# Altium PCB PCB1.PcbDoc
Units mm, origin at the board's own origin, x right, y up, seen from the top; angles counter-clockwise.
Board outline 60 x 65 mm, 2 copper layers (Top Layer, Bottom Layer); 40 components, 29 nets, 152 pads, 30 vias.
Unrouted connection lines stored in the file: 1.
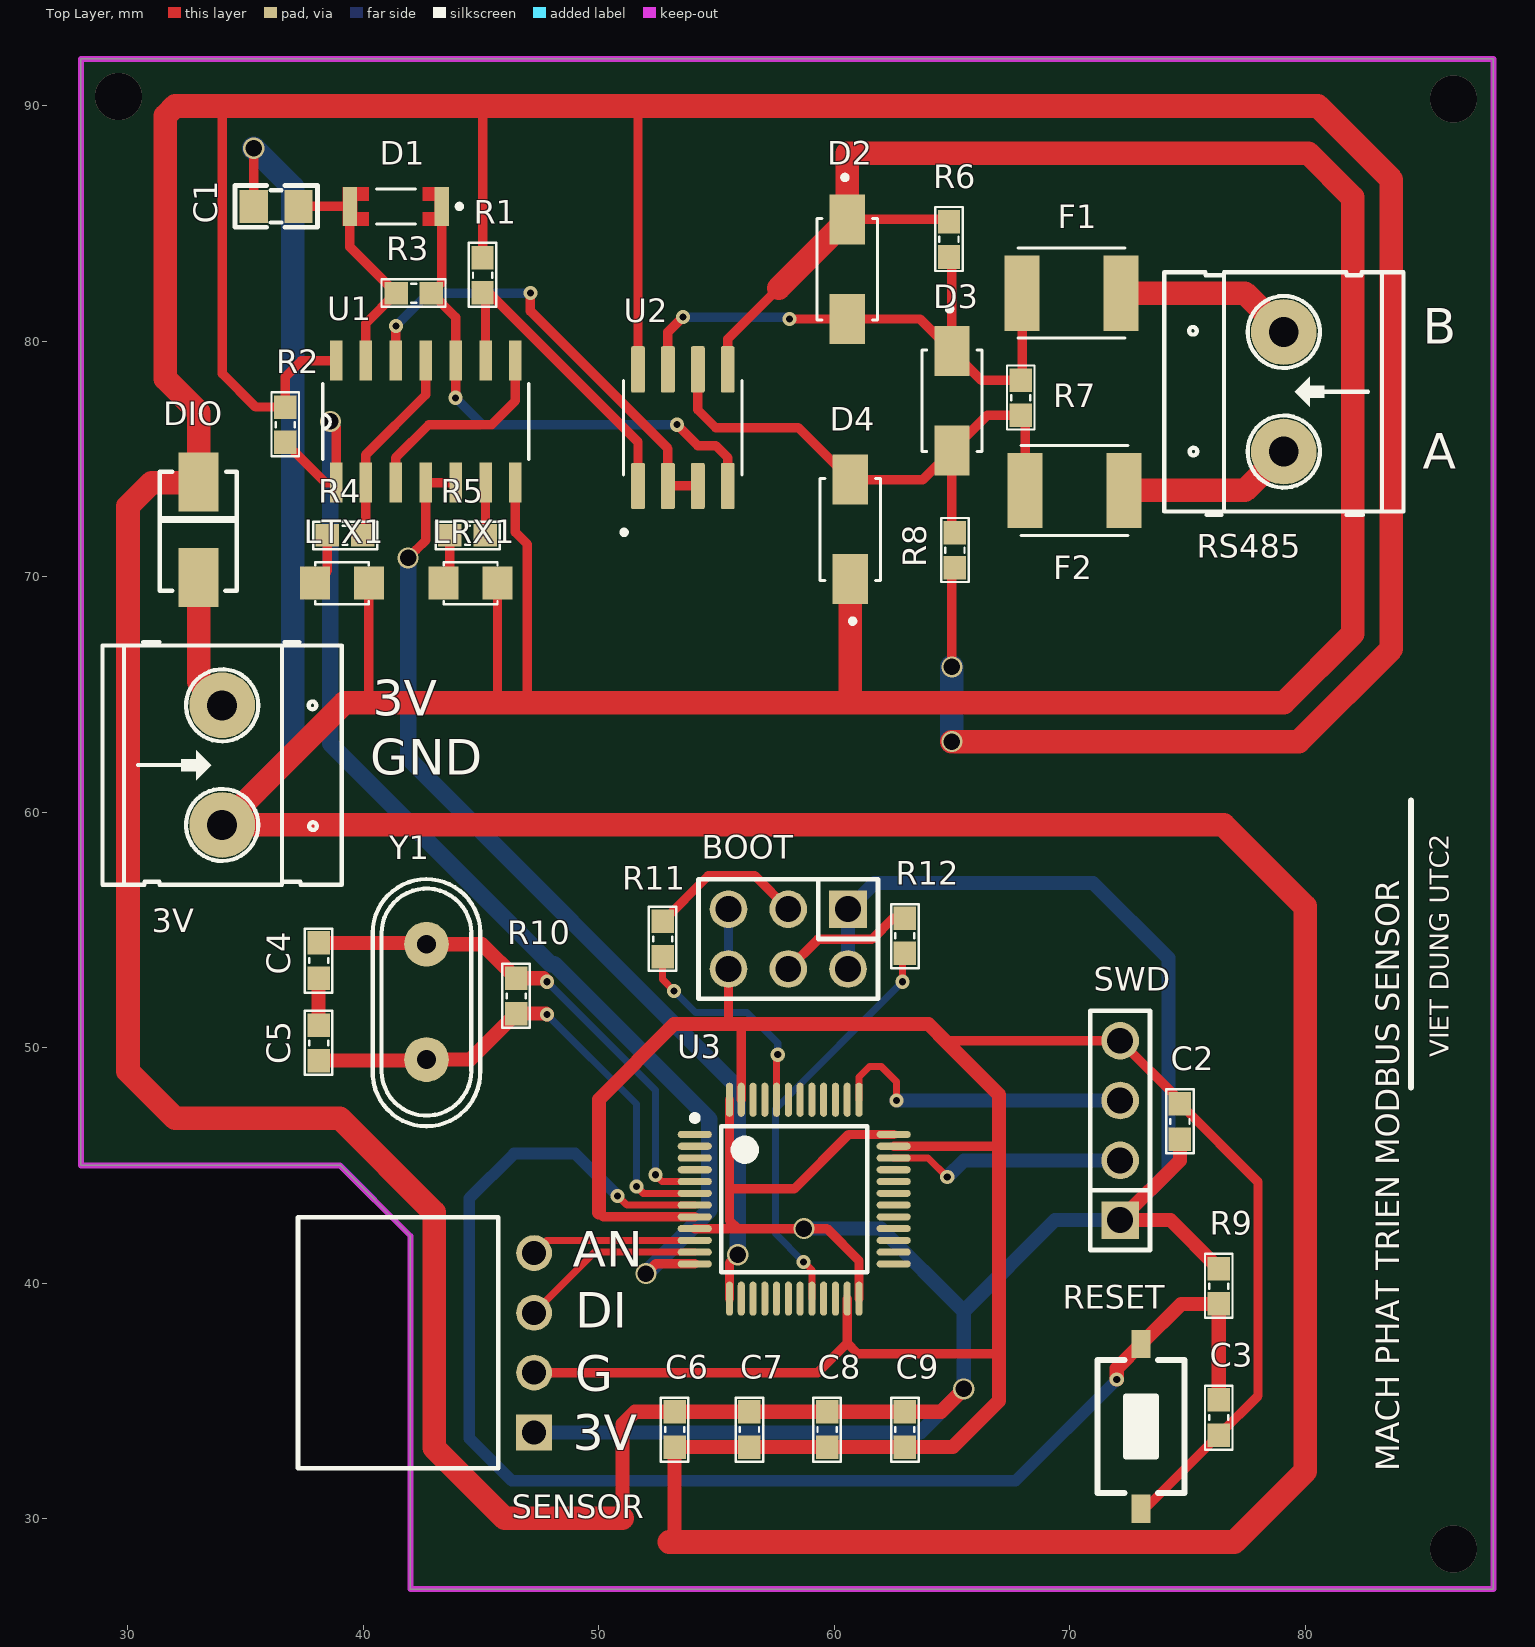
[diagram p0: Top Layer view]
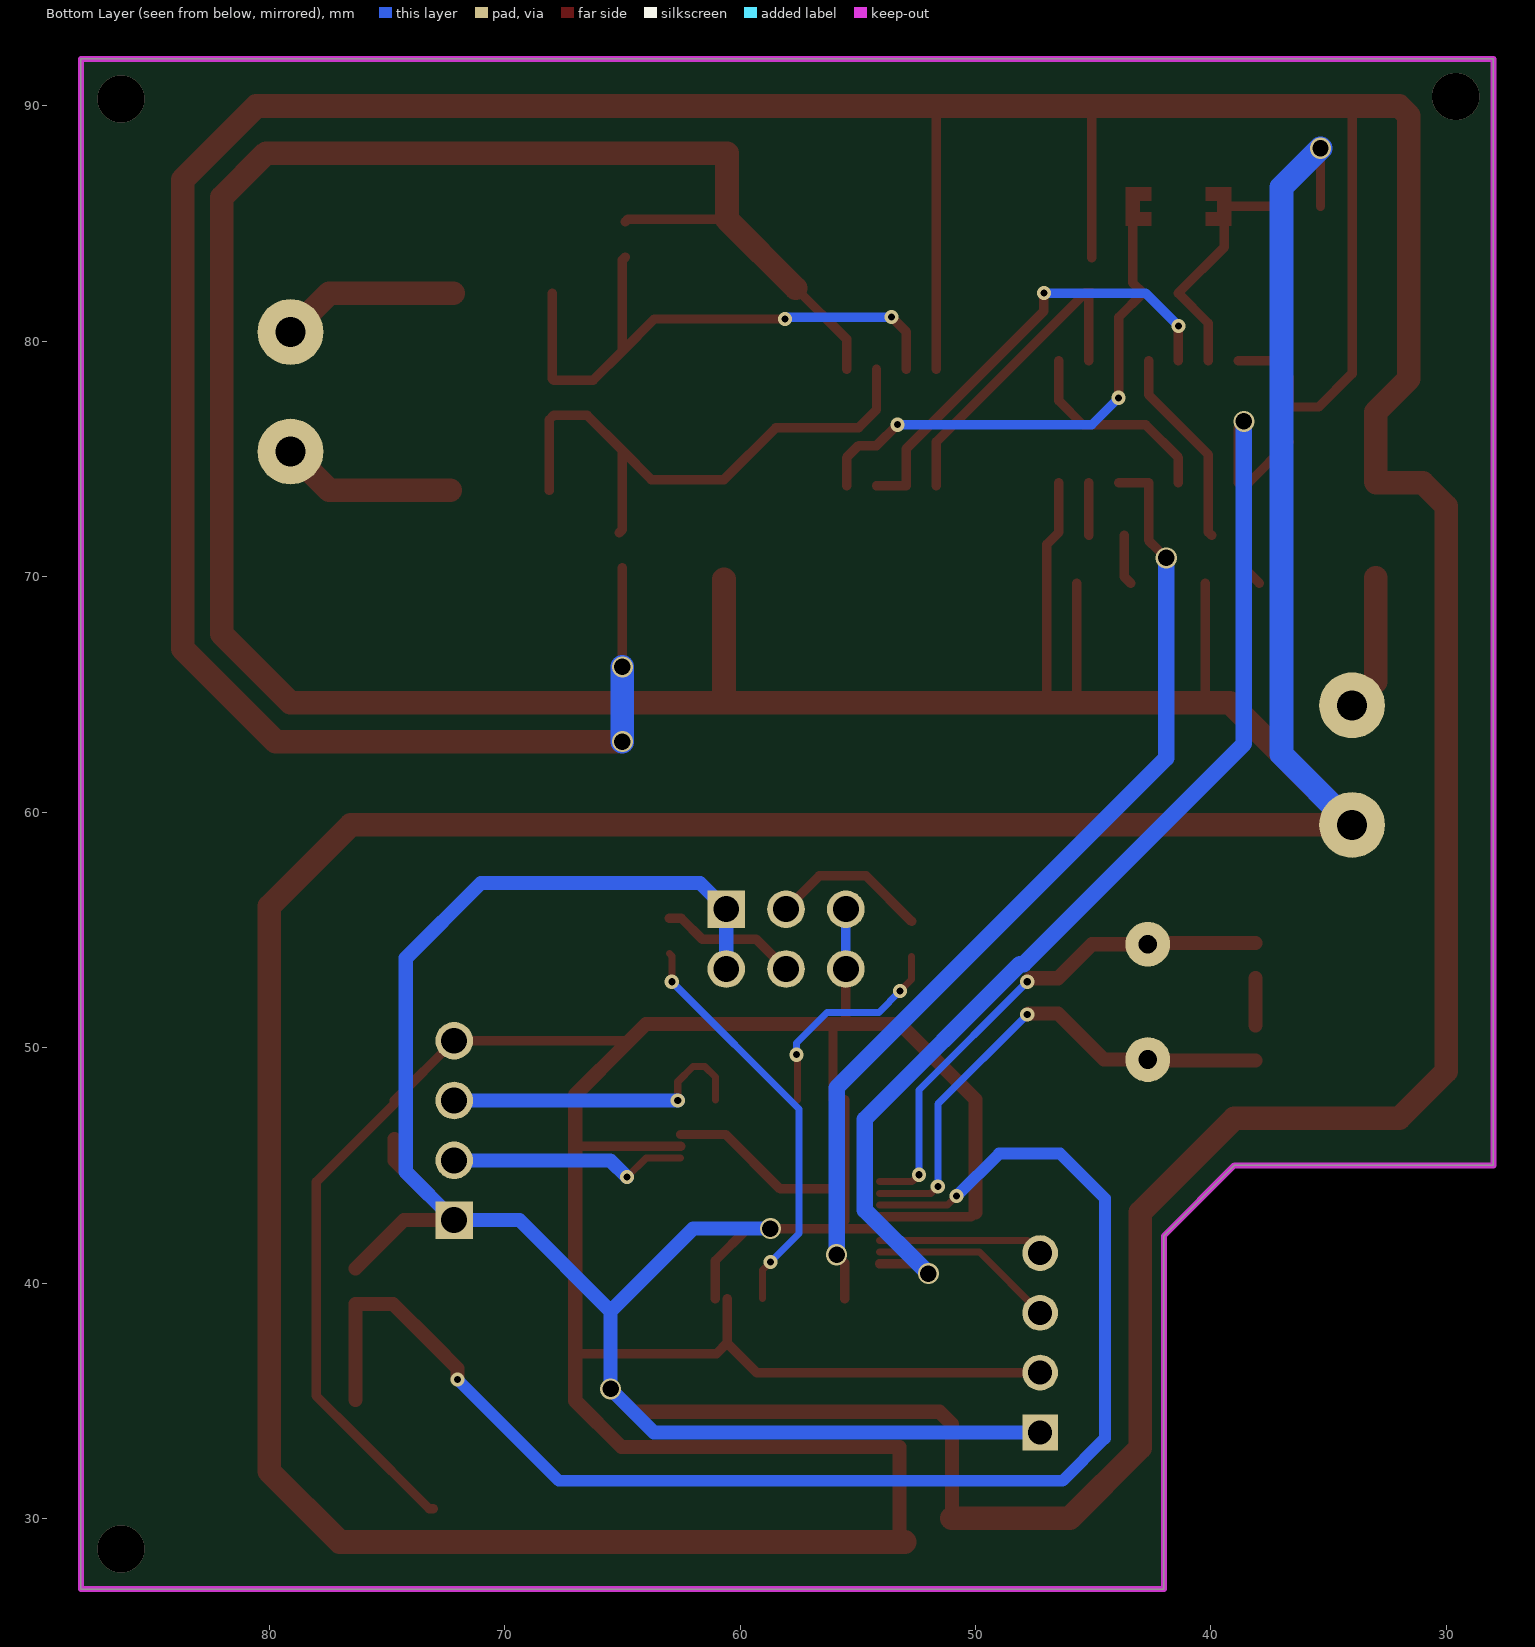
[diagram p1: Bottom Layer view, seen from below]

## Layer stack, top to bottom
Top Solder: solder mask 0.0102, Solder Resist, Dk 3.5
Top Layer: signal copper 0.0356
Dielectric 1: dielectric 0.32, FR-4, Dk 4.8
Bottom Layer: signal copper 0.0356
Bottom Solder: solder mask 0.0102, Solder Resist, Dk 3.5

## Board outline
42,42 39,45 28,45 28,92 88,92 88,27 42,27

## Design rules (kind name [scope] priority, off if disabled: settings)
Clearance [All] p1: gap=0.1 ignorepadtopadclearanceinfootprint=FALSE
PolygonConnect [All] p1: connectstyle=Relief reliefconductorwidth=0.254 reliefentries=4 polygonreliefangle="90 Angle" airgapwidth=0.254
RoutingVias [InNetClass('Power')] p1: holewidth=0.7 width=0.9 viastyle="Through Hole" minholewidth=0.7 minwidth=0.9 maxholewidth=0.7 maxwidth=0.9
RoutingVias RoutingVias_1 [InNetClass('All Nets')] p2: holewidth=0.3 width=0.6 viastyle="Through Hole" minholewidth=0.3 minwidth=0.6 maxholewidth=0.3 maxwidth=0.6
SolderMaskExpansion [All] p1: expansion=0.102
Width [InNetClass('Power')] p1: maxlimit=2 minlimit=0.4 preferedwidth=1
Width Width_1 [InNetClass('All Nets')] p2: maxlimit=1 minlimit=0.3 preferedwidth=0.4
30 further rules are at their usual default settings.

## Classes and differential pairs
net class Power: GND RX2 TX2 VCC3V
component class U_rs485: C1 D1 D2 D3 D4 F1 F2 LRX1 LTX1 R1 R2 R3 R4 R5 R6 R7 R8 RS485 U1 U2
component class Sheet1: BOOT C2 C3 C4 C5 C6 C7 C8 C9 R9 R10 R11 R12 RESET SENSOR SWD U3 Y1

## Components (designator, comment, footprint, x,y, rotation, side; value= is the part's Value field where it differs from the comment)
3V "KF128 2P" KF128_2P 34,62 r270 top (schematic designator P1)
BOOT "JP 2x3 2.54" "JP 2x3 DT" 58.047,54.611 r180 top (schematic designator JP3)
C1 "33pF" "tu 0805" 36.298,85.733 r180 top
C2 "104" "tu 0603" 74.684,46.864 r90 top
C3 "105" "tu 0603" 76.335,34.291 r270 top
C4 "22pF" "tu 0603" 38.1,53.7 r270 top
C5 "22pF" "tu 0603" 38.1,50.2 r90 top
C6 "104" "tu 0603" 53.221,33.783 r270 top
C7 "104" "tu 0603" 56.396,33.783 r270 top
C8 "104" "tu 0603" 59.698,33.783 r270 top
C9 "104" "tu 0603" 63,33.783 r270 top
D1 "LL4148" DIO_LL4148 41.378,85.733 r180 top
D2 "SMAJ45A" DIOM4325X250N 60.555,83.066 r270 top
D3 "SMAJ45A" DIOM4325X250N 65,77.478 r270 top
D4 "SMAJ45A" DIOM4325X250N 60.682,72.017 r90 top
DIO "Comment" DIODE_DO214AC_SMA 33,72 r90 top
F1 "MF-MSMF020-2" FUSER_MF-MSMF020-2 70.08,82.05 r0 top
F2 "MF-MSMF020-2" FUSER_MF-MSMF020-2 70.207,73.668 r0 top
LRX1 "LED 0805" LED-0805-Red 43.41,69.731 r0 top
LTX1 "LED 0805" LED-0805-Red 37.949,69.731 r0 top
R1 "4.7k" "tro smd 0603" 45.061,82.812 r90 top
R2 "4.7k" "tro smd 0603" 36.679,76.462 r90 top
R3 "51k" "tro smd 0603" 42.14,82.05 r180 top
R4 "2.2k" "tro smd 0603" 39.219,71.763 r0 top
R5 "2.2k" "tro smd 0603" 44.426,71.763 r0 top
R6 "4.7k" "tro smd 0603" 64.873,84.336 r90 top
R7 "150R" "tro smd 0603" 67.921,77.605 r90 top
R8 "4.7k" "tro smd 0603" 65.127,71.128 r90 top
R9 "10k" "tro smd 0603" 76.335,39.867 r90 top
R10 "1M" "tro smd 0603" 46.49,52.198 r90 top
R11 "100k" "tro smd 0603" 52.713,54.611 r90 top
R12 "100k" "tro smd 0603" 63,54.75 r270 top
RESET "Nut Nhan 2 Chan SMD 3x6x2.5" "Nut Nhan 2 Chan SMD 3x6x2.5" 73.033,33.91 r90 top (schematic designator BT1)
RS485 "KF128 2P" KF128_2P 79.097,77.859 r90 top (schematic designator P1)
SENSOR "Sensor" "JP 1x4 CC" 47.252,37.466 r90 top (schematic designator JP1)
SWD "SWD" "JP 1x4 DT" 72.144,42.673 r90 top (schematic designator JP2)
U1 "74HC04D" SOIC127P600X175-14N 42.648,76.589 r90 top
U2 "MAX485ESA+T" SOIC127P600X175-8N 53.57,76.335 r90 top
U3 "STM32F103xx_LQFP48" STM32_LQPF48 58.301,43.562 r0 top
Y1 "16Mhz" "Thach Anh 2 chan cam" 42.68,51.944 r90 top value=4Mhz

## Footprints (in the part's own frame and the unit in brackets; to place one, negate y for a bottom-side part, rotate by r counter-clockwise, add the part's x,y. Pads: shape width x height; smd on the part's side, far side on the other; paste and mask are expansions set on the pad)
DIO_LL4148 [mm]
  rect 0.6x1.65 smd: A(1.95,0) C(-1.95,0)
  Top Layer region: 2.25,-0.825 1.15,-0.825 1.15,-0.25 1.65,-0.25 1.65,0.25 1.15,0.25 1.15,0.825 2.25,0.825
  Top Layer region: -1.15,0.25 -1.65,0.25 -1.65,-0.25 -1.15,-0.25 -1.15,-0.825 -2.24,-0.825 -2.24,0.825 -1.15,0.825
  silkscreen extent -2.8,-0.75 0.83,0.75, body extent -1.73,-0.75 1.73,0.75, height 1.5
DIODE_DO214AC_SMA [mm] "Diode 2214AC- SMA type"
  rect 2.5x1.7 smd: 1(-2.032,0) 2(2.032,0)
  silkscreen extent -2.59,-1.63 2.46,1.7, body extent -2.53,-1.35 2.47,1.35, height 2.25
DIOM4325X250N [mm]
  rect 2.12x1.5 smd: A(2.115,0) C(-2.115,0)
  silkscreen extent -4,-1.28 2.16,1.28
FUSER_MF-MSMF020-2 [mm]
  rect 1.5x3.2 smd: 1(-2.1,0) 2(2.1,0)
  silkscreen extent -2.27,-1.91 2.27,1.91, body extent -2.27,-1.62 2.27,1.62, height 0.85
"JP 1x4 CC" [mm]
  rect 1.52x1.52 hole 1.02: 1(-3.81,0)
  round 1.52 hole 1.02: 2(-1.27,0) 3(1.27,0) 4(3.81,0)
  silkscreen extent -5.33,1.52 5.33,10.03, body extent -5.33,-0.25 5.33,10.05, height 2.51
"JP 1x4 DT" [mm] "4 pins, 1 row, straight, gold plating"
  rect 1.6x1.6 hole 1.1: 1(0,0)
  round 1.6 hole 1.1: 2(2.54,0) 3(5.08,0) 4(7.62,0)
  silkscreen extent -1.27,-1.27 8.89,1.27, body extent -1.27,-1.27 8.89,1.27, height 8.54
"JP 2x3 DT" [mm]
  rect 1.6x1.6 hole 1.1: 1(-2.54,-1.27)
  round 1.6 hole 1.1: 2(0,-1.27) 3(2.54,-1.27) 4(2.54,1.27) 5(0,1.27) 6(-2.54,1.27)
  silkscreen extent -3.81,-2.54 3.81,2.54, body extent -3.81,-2.54 3.81,2.54, height 8.55
KF128_2P [mil] "Header 2,pitch 5.08mm, Colour Green"
  round 110 hole 50: 1(-100,0) 2(100,0)
  silkscreen extent -206,-200 200,200, body extent -223,-207 201,207, height 563
LED-0805-Red [mil]
  rect 50x55 smd: 1(0,0) 2(90,0)
  silkscreen extent 0,-35 90,35, body extent 5,-25 85,25, height 43
"Nut Nhan 2 Chan SMD 3x6x2.5" [mm] "Switch SMD type"
  rect 1.2x0.8 smd: 1(-3.5,0) 2(3.5,0)
  silkscreen extent -2.82,-1.85 2.82,1.85, body extent -3.05,-1.85 3.05,1.85, height 2.5
SOIC127P600X175-8N [mm]
  rrect25% 1.97x0.59 smd: 1(-2.475,1.905) 2(-2.475,0.635) 3(-2.475,-0.635) 4(-2.475,-1.905) 5(2.475,-1.905) 6(2.475,-0.635) 7(2.475,0.635) 8(2.475,1.905)
  silkscreen extent -4.54,-2.52 2,2.59, body extent -3,-2.45 3,2.45, height 1.75
SOIC127P600X175-14N [mil]
  rect 67x21 smd: 1(-102,150) 2(-102,100) 3(-102,50) 4(-102,0) 5(-102,-50) 6(-102,-100) 7(-102,-150) 8(102,-150) 9(102,-100) 10(102,-50) 11(102,0) 12(102,50) 13(102,100) 14(102,150)
  silkscreen extent -63,-172 63,172
STM32_LQPF48 [mm]
  oval 1.45x0.3 smd: 1(-4.225,2.75) 2(-4.225,2.25) 3(-4.225,1.75) 4(-4.225,1.25) 5(-4.225,0.75) 6(-4.225,0.25) 7(-4.225,-0.25) 8(-4.225,-0.75) 9(-4.225,-1.25) 10(-4.225,-1.75) 11(-4.225,-2.25) 12(-4.225,-2.75) 25(4.225,-2.75) 26(4.225,-2.25) 27(4.225,-1.75) 28(4.225,-1.25) 29(4.225,-0.75) 30(4.225,-0.25) 31(4.225,0.25) 32(4.225,0.75) 33(4.225,1.25) 34(4.225,1.75) 35(4.225,2.25) 36(4.225,2.75)
  oval 0.3x1.45 smd: 13(-2.75,-4.225) 14(-2.25,-4.225) 15(-1.75,-4.225) 16(-1.25,-4.225) 17(-0.75,-4.225) 18(-0.25,-4.225) 19(0.25,-4.225) 20(0.75,-4.225) 21(1.25,-4.225) 22(1.75,-4.225) 23(2.25,-4.225) 24(2.75,-4.225) 37(2.75,4.225) 38(2.25,4.225) 39(1.75,4.225) 40(1.25,4.225) 41(0.75,4.225) 42(0.25,4.225) 43(-0.25,4.225) 44(-0.75,4.225) 45(-1.25,4.225) 46(-1.75,4.225) 47(-2.25,4.225) 48(-2.75,4.225)
  silkscreen extent -4.35,-3.1 3.1,3.57, body extent -4.5,-4.5 4.5,4.5, height 1.6
"Thach Anh 2 chan cam" [mm]
  round 1.905 hole 0.8: 1(-2.45,0) 2(2.45,0)
  silkscreen extent -5.28,-2.29 5.21,2.29, body extent -5.68,-2.36 5.68,2.29, height 3.5
"tro smd 0603" [mm] "Chip Capacitor, 2-Leads, Body 1,60x0,80mm, IPC Medium Density"
  rect 1x0.95 smd mask+0.076: 1(-0.75,0) 2(0.75,0)
  silkscreen extent -1.35,-0.58 1.37,0.58, body extent -0.82,-0.42 0.82,0.43, height 0.44
"tu 0603" [mm] "Chip Capacitor, 2-Leads, Body 1,60x0,80mm, IPC Medium Density"
  rect 1x0.95 smd mask+0.076: 1(-0.75,0) 2(0.75,0)
  silkscreen extent -1.35,-0.58 1.37,0.58, body extent -0.8,-0.4 0.8,0.4, height 0.9
"tu 0805" [mm] "Compoment SMD 80x50mil"
  rect 1.2x1.4 smd: 1(-0.946,-0.003) 2(0.954,-0.003)
  silkscreen extent -1.75,-0.89 1.75,0.89, body extent -1.01,-0.64 1.01,0.63, height 0.61

## Part data
3V RS485: "Header, 2-Pin, pitch 5.08mm", MPN=KF128-2P, Solder=WAVE
BOOT: library part "JP 2x3 2.54 Duc Thang", "C?m", Chung_Loai=C?m, Don_Vi=Con, Ma_Hang=MH002686, Ten_Linh_Kien="Jump Ðôi Ð?c 2.54MM 2x40P Th?ng 11MM"
C1: library part "Tu 0805 33pF 50V 10%", "Dán", Chung_Loai=Dán, Don_Vi=Con, Ma_Hang=MH004563, So_Chan=2, Ten_Linh_Kien="T? 0805 33p 10% 50V"
C2 C6 C7 C8 C9: library part "Tu 0603 104 50V 10%", "Dán", Chung_Loai=Dán, Don_Vi=Con, Ma_Hang=MH004568, So_Chan=2, Ten_Linh_Kien="T? 0603 104-100nF 10% 50V"
C3: library part "Tu 0603 105 16V 20%", "Dán", Chung_Loai=Dán, Don_Vi=Con, Ma_Hang=MH004574, So_Chan=2, Ten_Linh_Kien="T? 0603 105-1uF 20% 16V"
C4 C5: library part "Tu 0603 22pF 50V 10%", "Dán", Chung_Loai=Dán, Don_Vi=Con, Ma_Hang=MH004570, So_Chan=2, Ten_Linh_Kien="T? 0603 22pF 50V 10%"
D1: "Diode Small Signal Switching 100V 0.15A Automotive 2-Pin Mini-MELF T/R", Package="MINIMELF-2 Diotec", Availability="In Stock", Check_prices=https://www.snapeda.com/parts/LL4148/Diotec/view-part/?ref=eda, MF="Diotec Semiconductor", MP=LL4148, Price=None, Purchase-URL=https://pricing.snapeda.com/search/part/LL4148/?ref=eda, SnapEDA_Link=https://www.snapeda.com/parts/LL4148/Diotec/view-part/?ref=snap
D2 D3 D4: "72.7V Clamp 5.5A Ipp Tvs Diode Surface Mount DO-214AC (SMA)", Package=DO-214, Availability=Unavailable, Check_prices=https://www.snapeda.com/parts/SMAJ45A/Littelfuse/view-part/?ref=eda, MF=Littelfuse, MP=SMAJ45A, Price=None, SnapEDA_Link=https://www.snapeda.com/parts/SMAJ45A/Littelfuse/view-part/?ref=snap
F1 F2: "Polymeric PTC Resettable Fuse 30V 200 mA Ih Surface Mount 1812 (4532 Metric), Concave", Package="1812 Bourns", Availability="In Stock", Check_prices=https://www.snapeda.com/parts/MF-MSMF020-2/Bourns/view-part/?ref=eda, MF=Bourns, MP=MF-MSMF020-2, Price=None, Purchase-URL=https://pricing.snapeda.com/search/part/MF-MSMF020-2/?ref=eda, SnapEDA_Link=https://www.snapeda.com/parts/MF-MSMF020-2/Bourns/view-part/?ref=snap
LRX1 LTX1: library part "LED 0805 Do", "Dán", Chung_Loai=Dán, Don_Vi=Con, Ma_Hang=MH000897, Ten_Linh_Kien="LED 0805 Màu Ð? (Red)"
R1 R2 R6 R8: library part "Tro 0603 5% 4.7k", "Dán", Chung_Loai=Dán, Don_Vi=Con, Ma_Hang=MH006327, So_Chan=2, Ten_Linh_Kien="Tr? 0603 5% 4.7k"
R3: library part "Tro 0603 5% 51k", "Dán", Chung_Loai=Dán, Don_Vi=Con, Ma_Hang=MH007666, So_Chan=2, Ten_Linh_Kien="Tr? 0603 5% 51k"
R4 R5: library part "Tro 0603 5% 2.2k", "Dán", Chung_Loai=Dán, Don_Vi=Con, Ma_Hang=MH006321, So_Chan=2, Ten_Linh_Kien="Tr? 0603 5% 2.2k"
R7: library part "Tro 0603 5% 150R", "Dán", Chung_Loai=Dán, Don_Vi=Con, Ma_Hang=MH006318, So_Chan=2, Ten_Linh_Kien="Tr? 0603 5% 150R"
R9: library part "Tro 0603 5% 10k", "Dán", Chung_Loai=Dán, Don_Vi=Con, Ma_Hang=MH006316, So_Chan=2, Ten_Linh_Kien="Tr? 0603 5% 10k"
R10: library part "Tro 0603 5% 1M", "Dán", Chung_Loai=Dán, Don_Vi=Con, Ma_Hang=MH006909, So_Chan=2, Ten_Linh_Kien="Tr? 0603 5% 1M"
R11 R12: library part "Tro 0603 5% 100k", "Dán", Chung_Loai=Dán, Don_Vi=Con, Ma_Hang=MH006314, So_Chan=2, Ten_Linh_Kien="Tr? 0603 5% 100k"
SENSOR: library part "JP 1x4 2.54 Cai Cong", "C?m", Chung_Loai=C?m, Don_Vi=Con, Ma_Hang=MH001265, Ten_Linh_Kien="Jump Ðon Cái 2.54MM 1x40P Cong"
SWD: library part "JP 1x4 2.54 Duc Thang", "C?m", Chung_Loai=C?m, Don_Vi=Con, Ma_Hang=MH000903, Ten_Linh_Kien="Jump Ðon Ð?c 2.54MM 1x40P Th?ng 11MM"
U1: "Inverter IC 6 Channel 14-SOIC", Package="SOIC-14 NXP Semiconductors", Availability=Unavailable, MF=Toshiba, MP=74HC04D, Price=None, SnapEDA_Link=https://www.snapeda.com/parts/74HC04D/Toshiba%20Semiconductor%20and%20Storage/view-part/1040011/?ref=snap
U2: "1/1 Transceiver Half RS422, RS485 8-SOIC", Package="SOIC-8 Maxim", Availability="In Stock", Check_prices=https://www.snapeda.com/parts/MAX485ESA/Maxim+Integrated/view-part/?ref=eda, MF="Maxim Integrated", MP=MAX485ESA, Price=None, Purchase-URL=https://pricing.snapeda.com/search/part/MAX485ESA/?ref=eda, SnapEDA_Link=https://www.snapeda.com/parts/MAX485ESA/Maxim+Integrated/view-part/?ref=snap
Y1: library part "Thach Anh 2 chan Cam", "Crystal For all Crystal 2pin."
RESET: Ma_Hang=MH001036, Ten="Nút Nh?n 2 Chân 3x6x2.5MM SMD"
U3: ComponentLink1Description="Manufacturer Link", ComponentLink1URL=www.st.com/stm32, ComponentLink2Description=Datasheet, ComponentLink2URL=http://www.st.com/stonline/products/literature/ds/13587.pdf, DatasheetVersion="rev6, Mar-2008", PackageDescription="48-Pin Low-Profile Quad Flat Pack, 7 x 7 mm Body, 0.5 mm Pitch (LQFP48)", PackageReference=LQFP48, PackageVersion=Mar-2008, Published=30-May-2008, Publisher="Altium Limited"

## Via types
v1: diameter 0.6, hole 0.3, Top Layer to Bottom Layer, 18 vias
v2: diameter 0.9, hole 0.7, Top Layer to Bottom Layer, 9 vias
v3: diameter 2, hole 2, Top Layer to Bottom Layer, 3 vias

## Nets (pads, with @x,y where several pads share a name; then routed paths per layer and width w, separated by ;. In a path a pad name is that pad's centre, name@x,y a point inside that pad or via, vN(x,y) a via of type N, cw(c..) or ccw(c..) an arc to the next point about the centre after c; other vN are vias at no path point)
A+: F2.2 RS485.1 | length 7.5
  Top Layer w1: F2.2 77.446,73.668 RS485.1
AN: SENSOR.4 U3.10 | length 7
  Top Layer w0.3: SENSOR.4 47.788,41.812 U3.10
B-: F1.2 RS485.2 | length 7.6
  Top Layer w1: F1.2 77.446,82.05 RS485.2
BOOT0: R11.1 U3.44 | length 9.4
  Top Layer w0.3: R11.1 52.713,52.887 v1(53.2,52.4) ; U3.44 57.551,49.651 v1(57.6,49.7)
  Bottom Layer w0.3: v1(53.2,52.4) 54.1,51.5 56.3,51.5 57.6,50.2 v1(57.6,49.7)
BOOT1: R12.2 U3.20 | length 17.6
  Top Layer w0.3: v1(58.7,40.9) 59.051,40.549 U3.20 ; v1(62.9,52.8) 62.9,53.9 R12.2
  Bottom Layer w0.3: v1(58.7,40.9) 57.5,42.1 57.5,47.4 v1(62.9,52.8)
DI: SENSOR.3 U3.11 | length 7.9
  Top Layer w0.3: SENSOR.3 49.828,41.312 U3.11
GND: 3V.2 BOOT.3 BOOT.4 C1.2 C2.2 C3.2 C6.2 C7.2 C8.2 C9.2 D2.C D4.C LRX1.2 LTX1.2 R6.2 RESET.1 SENSOR.2 SWD.4 U1.7 U2.5 U3.8 U3.23 U3.35 U3.47 | length 392.7
  Top Layer w0.4: C1.2 v2(35.344,88.208) ; 40.235,64.651 LTX1.2 ; 45.696,64.651 LRX1.2 ; U1.7 46.458,71.89 46.966,71.382 46.966,64.651 ; SENSOR.2 59.298,36.196 60.551,37.449 ; 50,43 50.188,42.812 U3.8 ; 55.4,51 55.507,51.107 BOOT.4 ; U2.5 55.475,80.101 57.634,82.26 ; 56,51 56.051,50.949 U3.47 ; U3.23 60.551,37.449 ; D2.C 64.778,85.181 R6.2 ; U3.35 66.812,45.812 67,46 ; 64.8,50.2 64.893,50.293 SWD.4 74.684,47.753 C2.2 78,44.298 78,35.206 C3.2 73.204,30.41 RESET.1 ; 67,37 61,37 60.551,37.449
  Top Layer w0.6: 50,43 50,47.8 53.2,51 55.4,51 56,51 64,51 64.8,50.2 67,48 67,46 67,37 67,35 65.033,33.033 C9.2 C8.2 C7.2 C6.2 53.221,29.221 53,29
  Top Layer w1: 53,29 77,29 80,32 80,56 76.54,59.46 3V.2 39.191,64.651 40.235,64.651 45.696,64.651 46.966,64.651 60.682,64.651 ; 57.634,82.26 D2.C 60.555,88 80.132,88 82.018,86.114 82.018,67.572 79.097,64.651 60.682,64.651 ; D4.C 60.682,64.651
  Bottom Layer w0.4: BOOT.4 BOOT.3
  Bottom Layer w1: 3V.2 37,62.46 37,86.551 v2(35.344,88.208)
NetC1_1: C1.1 D1.A R3.2 U1.13 | length 10.1
  Top Layer w0.4: C1.1 39.425,85.736 D1.A 39.428,84.012 R3.2 40.108,80.768 U1.13
NetC4_2: C4.2 C5.2 | length 2
  Top Layer w0.6: C5.2 C4.2
NetD1_C: D1.C R3.1 U1.10 U2.4 | length 22.5
  Top Layer w0.4: D1.C 43.328,82.488 R3.1 43.918,81.022 U1.10 v1(43.918,77.605) ; v1(53.316,76.462) 54.205,75.573 54.967,75.573 55.475,75.065 U2.4
  Bottom Layer w0.4: v1(43.918,77.605) 45.061,76.462 v1(53.316,76.462)
NetD2_A: D2.A D3.C F1.1 R6.1 R7.2 U2.7 | length 25.7
  Top Layer w0.4: U2.7 52.935,80.399 v1(53.57,81.034) ; v1(58.098,80.951) D2.A 63.642,80.951 D3.C ; R6.1 65,83.459 D3.C ; F1.1 67.98,78.414 R7.2 66.238,78.355 D3.C
  Bottom Layer w0.4: v1(53.57,81.034) 58.015,81.034 v1(58.098,80.951)
NetD3_A: D3.A D4.A F2.1 R7.1 R8.2 U2.6 | length 24.6
  Top Layer w0.4: U2.6 54.205,77.097 54.967,76.335 58.479,76.335 D4.A 63.769,74.132 D3.A ; R8.2 65,72.005 D3.A ; F2.1 68.107,76.669 R7.1 66.492,76.855 D3.A
NetJP3_2: BOOT.2 R11.2 | length 6.7
  Top Layer w0.4: R11.2 54.652,57.3 56.628,57.3 BOOT.2
NetJP3_5: BOOT.5 R12.1 | length 5.8
  Top Layer w0.4: BOOT.5 59.306,54.6 61.6,54.6 62.5,55.5 R12.1
NetLRX1_1: LRX1.1 R5.1 | length 2.1
  Top Layer w0.4: LRX1.1 43.676,69.997 R5.1
NetLTX1_1: LTX1.1 R4.1 | length 2.2
  Top Layer w0.4: LTX1.1 38.469,70.251 R4.1
NetR1_1: R1.1 U1.9 U2.1 | length 14
  Top Layer w0.4: U1.9 45.188,81.935 R1.1 45.335,82.062 51.665,75.732 U2.1
NetR4_2: R4.2 U1.2 U1.11 | length 8.5
  Top Layer w0.4: R4.2 40.108,71.902 U1.2 40.108,75.192 42.648,77.732 U1.11
NetR5_2: R5.2 U1.6 | length 2.2
  Top Layer w0.4: R5.2 45.188,71.775 U1.6
NetU1_3: U1.3 U1.8 | length 8.8
  Top Layer w0.4: U1.3 41.378,75.065 42.775,76.462 45.442,76.462 46.458,77.478 U1.8
NetU1_12: U1.12 U2.2 U2.3 | length 19.6
  Top Layer w0.4: U1.12 v1(41.378,80.653) ; v1(47.093,82.05) 47.093,81.288 52.935,75.446 U2.2 U2.3
  Bottom Layer w0.4: v1(41.378,80.653) 42.775,82.05 v1(47.093,82.05)
OSCIN: C4.1 R10.2 U3.5 Y1.2 | length 22.3
  Top Layer w0.3: v1(52.4,44.6) 52.688,44.312 U3.5
  Top Layer w0.6: C4.1 42.624,54.45 Y1.2 45.044,54.394 R10.2 47.652,52.948 v1(47.8,52.8)
  Bottom Layer w0.3: v1(47.8,52.8) 52.4,48.2 v1(52.4,44.6)
OSCOUT: C5.1 R10.1 U3.6 Y1.1 | length 22
  Top Layer w0.3: v1(51.6,44.1) 51.888,43.812 U3.6
  Top Layer w0.6: C5.1 42.636,49.45 Y1.1 44.536,49.494 R10.1 47.752,51.448 v1(47.8,51.4)
  Bottom Layer w0.3: v1(47.8,51.4) 51.6,47.6 v1(51.6,44.1)
RESET: C3.1 R9.1 RESET.2 U3.7 | length 61.5
  Top Layer w0.3: v1(50.8,43.7) 51.188,43.312 U3.7
  Top Layer w0.6: v1(72,35.9) 72,36.377 RESET.2 74.74,39.117 R9.1 C3.1
  Bottom Layer w0.5: v1(50.8,43.7) 49,45.5 46.4,45.5 44.5,43.6 44.5,33.4 46.3,31.6 67.7,31.6 v1(72,35.9)
RX2: U1.4 U1.5 U3.13 | length 41.7
  Top Layer w0.4: 42.247,71.148 42.648,71.548 U1.4 U1.5 ; U3.13 55.551,40.851 v2(55.9,41.2)
  Bottom Layer w0.7: v2(41.9,70.8) 41.9,62.3 55.9,48.3 v2(55.9,41.2)
SWDCLK: SWD.3 U3.37 | length 13.3
  Top Layer w0.3: U3.37 61.051,48.751 61.5,49.2 62,49.2 62.647,48.553 v1(62.647,47.753)
  Bottom Layer w0.6: v1(62.647,47.753) SWD.3
SWDIO: SWD.2 U3.34 | length 10.2
  Top Layer w0.3: U3.34 63.988,45.312 v1(64.8,44.5)
  Bottom Layer w0.6: v1(64.8,44.5) 65.513,45.213 SWD.2
TX2: R2.1 U1.1 U3.12 | length 51.9
  Top Layer w0.4: R2.1 38.393,73.998 U1.1 38.838,76.362 v2(38.6,76.6) ; v2(52,40.4) 52.412,40.812 U3.12
  Bottom Layer w0.7: v2(38.6,76.6) 38.6,62.9 47.95,53.55 48.111,53.55 54.7,46.961 54.7,43.1 v2(52,40.4)
VCC3V: 3V.1 BOOT.1 BOOT.6 C2.1 C6.1 C7.1 C8.1 C9.1 DIO.1 DIO.2 R1.2 R2.2 R8.1 R9.2 SENSOR.1 SWD.1 U1.14 U2.8 U3.9 U3.24 U3.36 U3.48 | length 341.4
  Top Layer w0.4: 34,90 34,78.633 35.421,77.212 R2.2 36.679,78.494 37.365,79.18 U1.14 ; R1.2 45.061,90 ; U2.8 51.665,90 ; U3.9 54.088,42.3 54.1,42.312 55.888,42.312 ; U3.48 55.551,44 ; U3.24 61.051,40.949 59.688,42.312 v2(58.712,42.312) 55.888,42.312 ; U3.36 60.612,46.312 58.3,44 55.551,44 ; v2(65,66.175) R8.1@65,70.378 ; 55.551,44 55.551,42.649 55.888,42.312
  Top Layer w0.6: 51,30 51,34 51.533,34.533 C6.1 C7.1 C8.1 C9.1 64.533,34.533 v2(65.5,35.5) ; C2.1 74.684,45.213 SWD.1 74.279,42.673 R9.2
  Top Layer w1: DIO.1 33,65.54 3V.1 ; 51,30 46,30 43,33 43,43 39,47 32,47 30,49 30,73 31,74 32.968,74 DIO.2 33,77 31.589,78.411 31.589,89.589 32,90 34,90 45.061,90 51.665,90 80.545,90 83.669,86.876 83.669,66.937 79.732,63 v2(65,63)
  Bottom Layer w0.6: SENSOR.1 63.656,33.656 v2(65.5,35.5) 65.5,38.8 ; v2(58.712,42.312) 61.988,42.312 65.5,38.8 ; BOOT.6 BOOT.1 61.706,57 71,57 74.2,53.8 74.2,44.729 SWD.1 69.373,42.673 65.5,38.8
  Bottom Layer w1: v2(65,63) v2(65,66.175)
pads on no net: U3.1 U3.2 U3.3 U3.4 U3.14 U3.15 U3.16 U3.17 U3.18 U3.19 U3.21 U3.22 U3.25 U3.26 U3.27 U3.28 U3.29 U3.30 U3.31 U3.32 U3.33 U3.38 U3.39 U3.40 U3.41 U3.42 U3.43 U3.45 U3.46
copper on no net:
  other v3: 86.3,28.7 86.3,90.3 29.6,90.4

## Keep-outs
Keep-Out Layer:
  lines w0.254: 28,45 28,92 88,92 88,27 42,27 42,42 39,45 37,45 28,45

## Silkscreen, mask and mechanical layers (free items; w line width, h text height)
Top Overlay:
  lines w0.254: 84.5,48.3 84.5,60.5
  text "B" at 85,79.9 h1.52
  text "A" at 85,74.6 h1.52
  text "3V" at 40.4,64.1 h1.52
  text "GND" at 40.3,61.6 h1.52
  text "VIET DUNG UTC2" at 86.1,49.6 h0.8 r90
  text "AN" at 48.9,40.7 h1.52
  text "DI" at 49,38.1 h1.52
  text "G" at 49,35.4 h1.52
  text "3V" at 48.9,32.9 h1.52
  text "MACH PHAT TRIEN MODBUS SENSOR" at 84,32 h1 r90

## Dimensions
28,92 to 88,92 on Multi-Layer
88,27 to 88,92 on Multi-Layer
42,27 to 88,27 on Multi-Layer